# Altium PCB HeartRate_Bot.PcbDoc
Units mil, origin at the board's own origin, x right, y up, seen from the top; angles counter-clockwise.
Board outline 1387.59 x 1393.1 mil, 2 copper layers (Top Layer, Bottom Layer); 2 components, 0 nets, 12 pads, 0 vias.
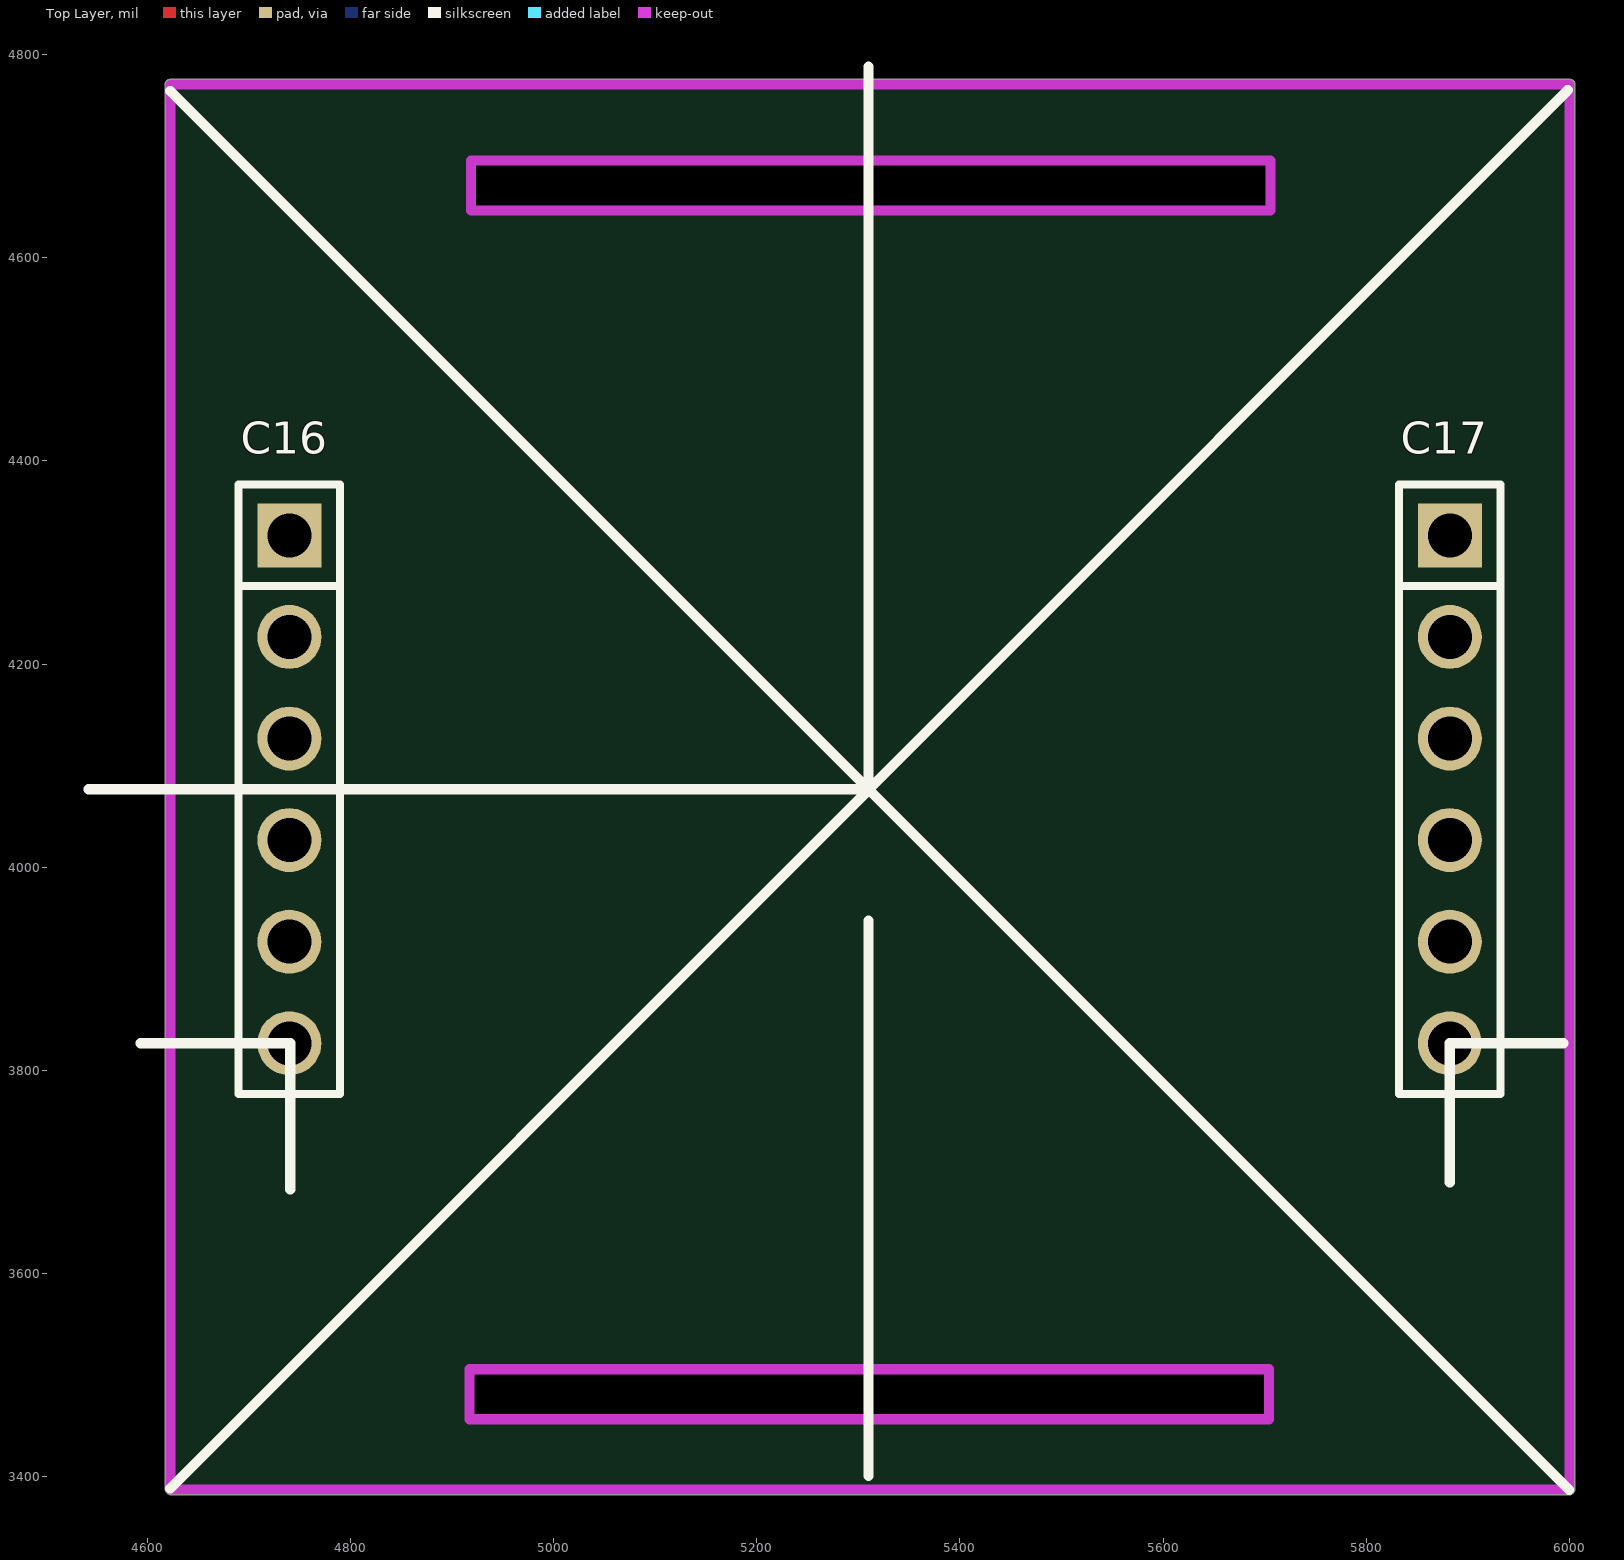
[diagram p0: Top Layer view]
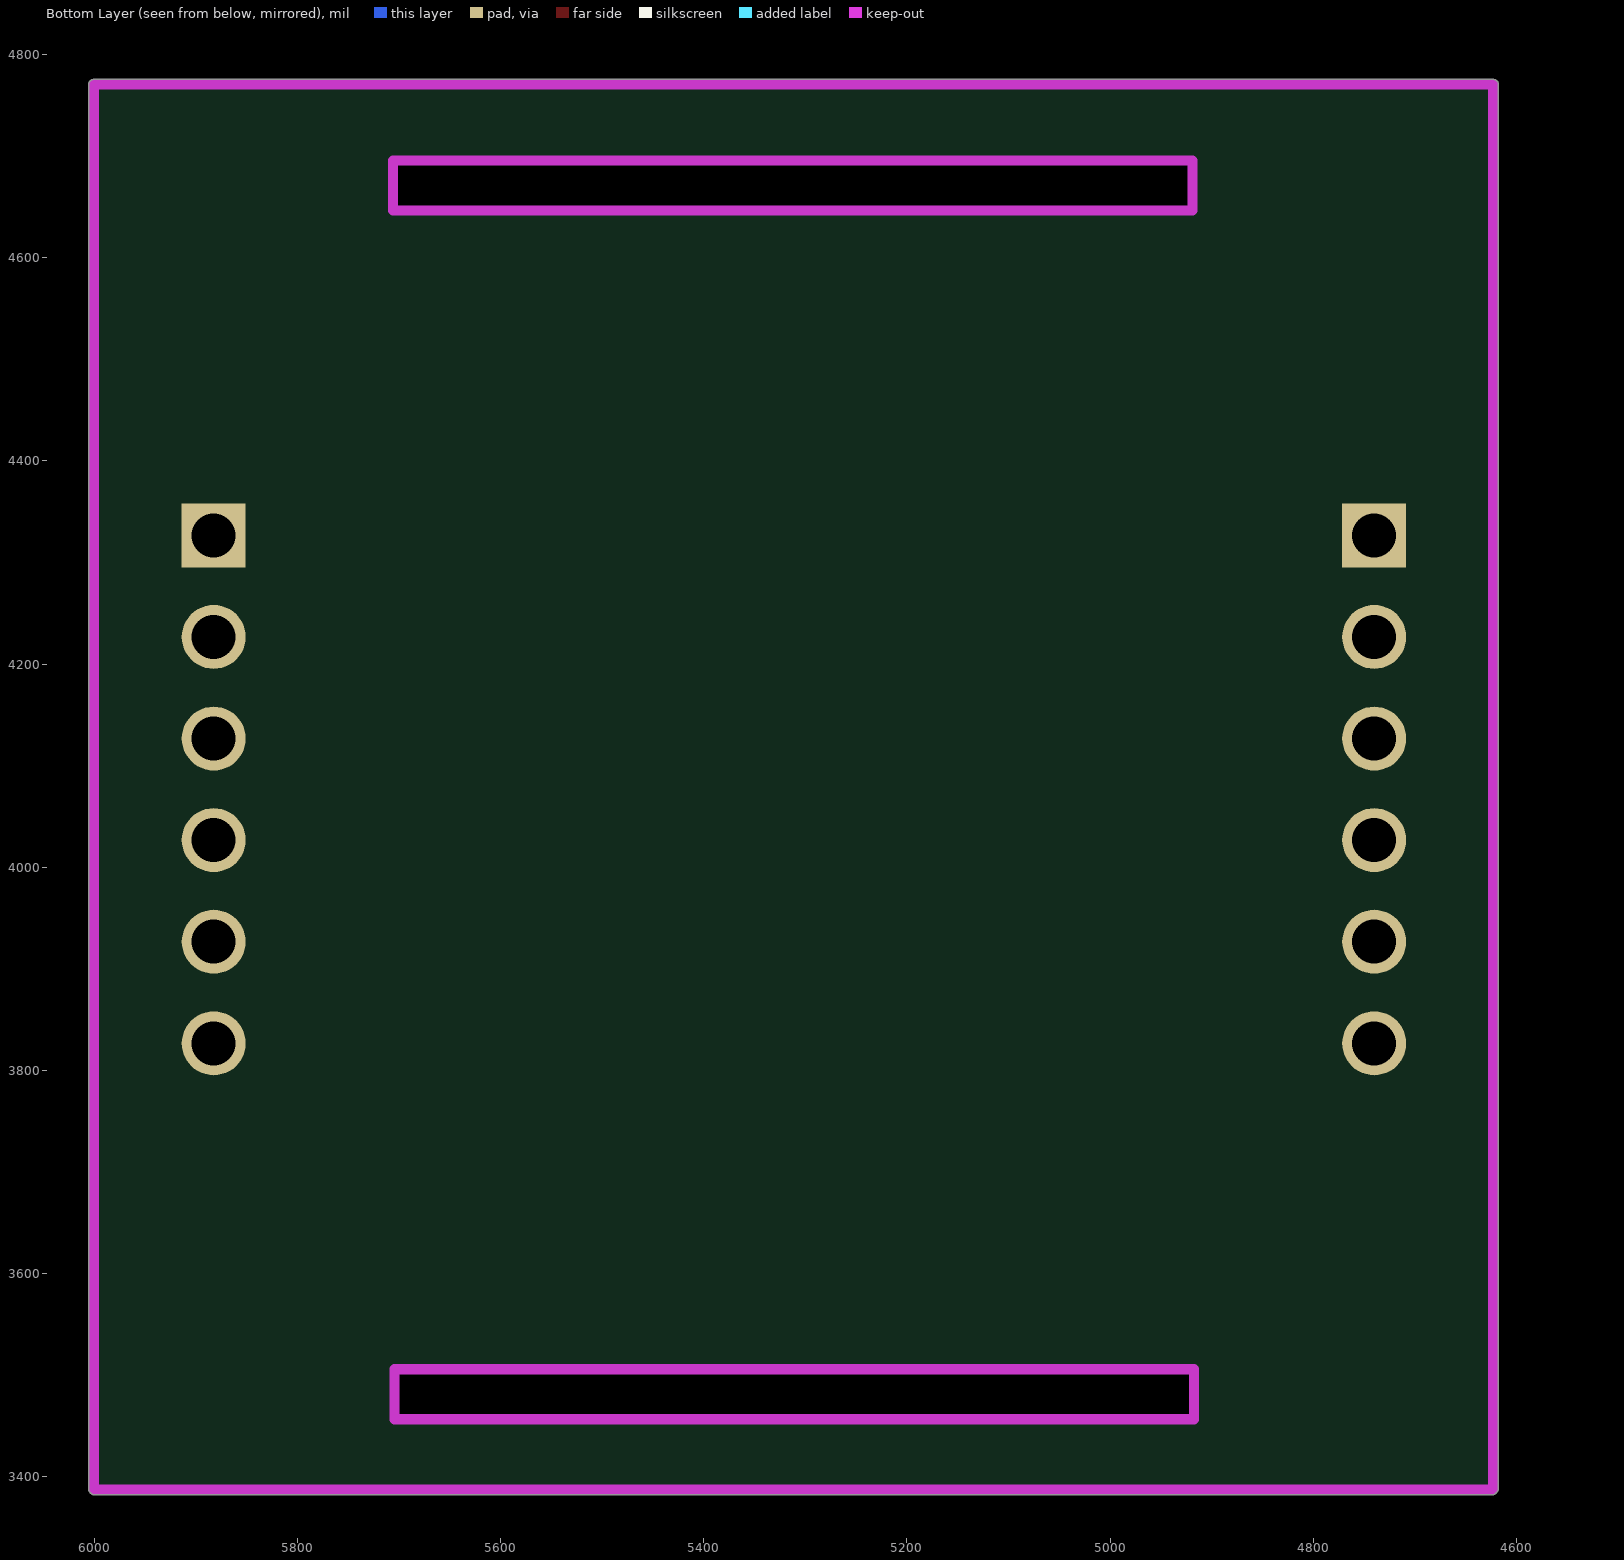
[diagram p1: Bottom Layer view, seen from below]

## Layer stack, top to bottom
Top Solder: solder mask 0.4, Solder Resist, Dk 3.5
Top Layer: signal copper 1.4
Dielectric 1: dielectric 12.6, FR-4, Dk 4.8
Bottom Layer: signal copper 1.4
Bottom Solder: solder mask 0.4, Solder Resist, Dk 3.5

## Board outline
4619.85,3384.46 cw(c4622.76,3388.54) 4617.74,3388.54 4617.74,4770.43 cw(c4622.76,4770.43) 4622.76,4775.45 6000.31,4775.45 cw(c6000.31,4770.43) 6005.33,4770.43 6005.33,3388.15 cw(c6000.31,3388.15) 6003.45,3384.23 cw(c5999.53,3387.36) 5999.53,3382.35 4623.94,3382.35 cw(c4623.94,3387.36)
cut-out: 4917.24,3505.87 4917.24,3456.65 5704.25,3456.65 5704.25,3505.87
cut-out: 4918.82,4695.63 4918.82,4646.42 5705.83,4646.42 5705.83,4695.63

## Design rules (kind name [scope] priority, off if disabled: settings)
Clearance [All] p1: gap=10 ignorepadtopadclearanceinfootprint=FALSE except(0: Arc-Hole Track-Hole SMDPad-Hole THPad-Hole Via-Hole Fill-Hole Poly-Hole Region-Hole Text-Hole)
PolygonConnect [All] p1: connectstyle=Relief reliefconductorwidth=10 reliefentries=4 polygonreliefangle="90 Angle" airgapwidth=10
RoutingVias [All] p1: holewidth=28 width=50 viastyle="Through Hole" minholewidth=28 minwidth=50 maxholewidth=28 maxwidth=50
SolderMaskExpansion [All] p1: expansion=4
Width [All] p1: maxlimit=10 minlimit=10 preferedwidth=10
30 further rules are at their usual default settings.

## Components (designator, comment, footprint, x,y, rotation, side; value= is the part's Value field where it differs from the comment)
C16 "JP6" JP6-D1T 4740,4326.73 r270 top
C17 "JP6" JP6-D1T 5882.2,4326.73 r270 top

## Footprints (in the part's own frame and the unit in brackets; to place one, negate y for a bottom-side part, rotate by r counter-clockwise, add the part's x,y. Pads: shape width x height; smd on the part's side, far side on the other; paste and mask are expansions set on the pad)
JP6-D1T [mm] "6 pins, 1 row, straight, gold plating"
  rect 1.6x1.6 hole 1.1: 1(0,0)
  round 1.6 hole 1.1: 2(2.54,0) 3(5.08,0) 4(7.62,0) 5(10.16,0) 6(12.7,0)
  silkscreen extent -1.27,-1.27 13.97,1.27, body extent -1.27,-1.27 13.97,1.27, height 8.54

## Part data
C16 C17: "WR-PHD 2.54 mm Angled Socket Header", Manufacturer="Würth Elektronik eiSos GmbH", partNo=613006143121, ComponentLink1 Description=Manufacturer, ComponentLink1URL=http://www.we-online.com, ComponentLink2 Description=Datasheet, ComponentLink2URL=http://katalog.we-online.de/em/datasheet/6130xx143121.pdf, Created by="Karrer Zheng", Created Date="29 March 2013", NoPins=06

## Nets (pads, with @x,y where several pads share a name; then routed paths per layer and width w, separated by ;. In a path a pad name is that pad's centre, name@x,y a point inside that pad or via, vN(x,y) a via of type N, cw(c..) or ccw(c..) an arc to the next point about the centre after c; other vN are vias at no path point)
pads on no net: C16.1 C16.2 C16.3 C16.4 C16.5 C16.6 C17.1 C17.2 C17.3 C17.4 C17.5 C17.6

## Keep-outs
Keep-Out Layer:
  lines w10: 4622.76,3388.54 4622.76,4380.28 4622.76,4770.43 6000.31,4770.43 6000.31,3388.15 ; 4623.94,3387.36 5999.53,3387.36 ; 4917.24,3456.65 5704.25,3456.65 5704.25,3505.87 4917.24,3505.87 4917.24,3456.65 ; 4918.82,4646.42 4918.82,4695.63 5705.83,4695.63 5705.83,4646.42 4918.82,4646.42

## Silkscreen, mask and mechanical layers (free items; w line width, h text height)
Top Overlay:
  lines w10: 4542.44,4076.73 5310.16,4076.73 5310.16,4788.06 ; 4593.62,3826.73 4740.87,3826.73 4740.87,3683.03 ; 4622.76,3388.54 5998.35,4764.92 ; 4622.76,4764.13 5999.53,3387.36 ; 5310.16,3400.75 5310.16,3947.6 ; 5882.2,3689.72 5882.2,3826.73 5994.02,3826.73